# Altium PCB TE7300.PcbDoc
Units mil, origin at the board's own origin, x right, y up, seen from the top; angles counter-clockwise.
Board outline 1000 x 1000 mil, 2 copper layers (L 01, L 08), stack 57.418 mil thick; 7 components, 7 nets, 57 pads, 0 vias.
Unrouted connection lines stored in the file: 1.
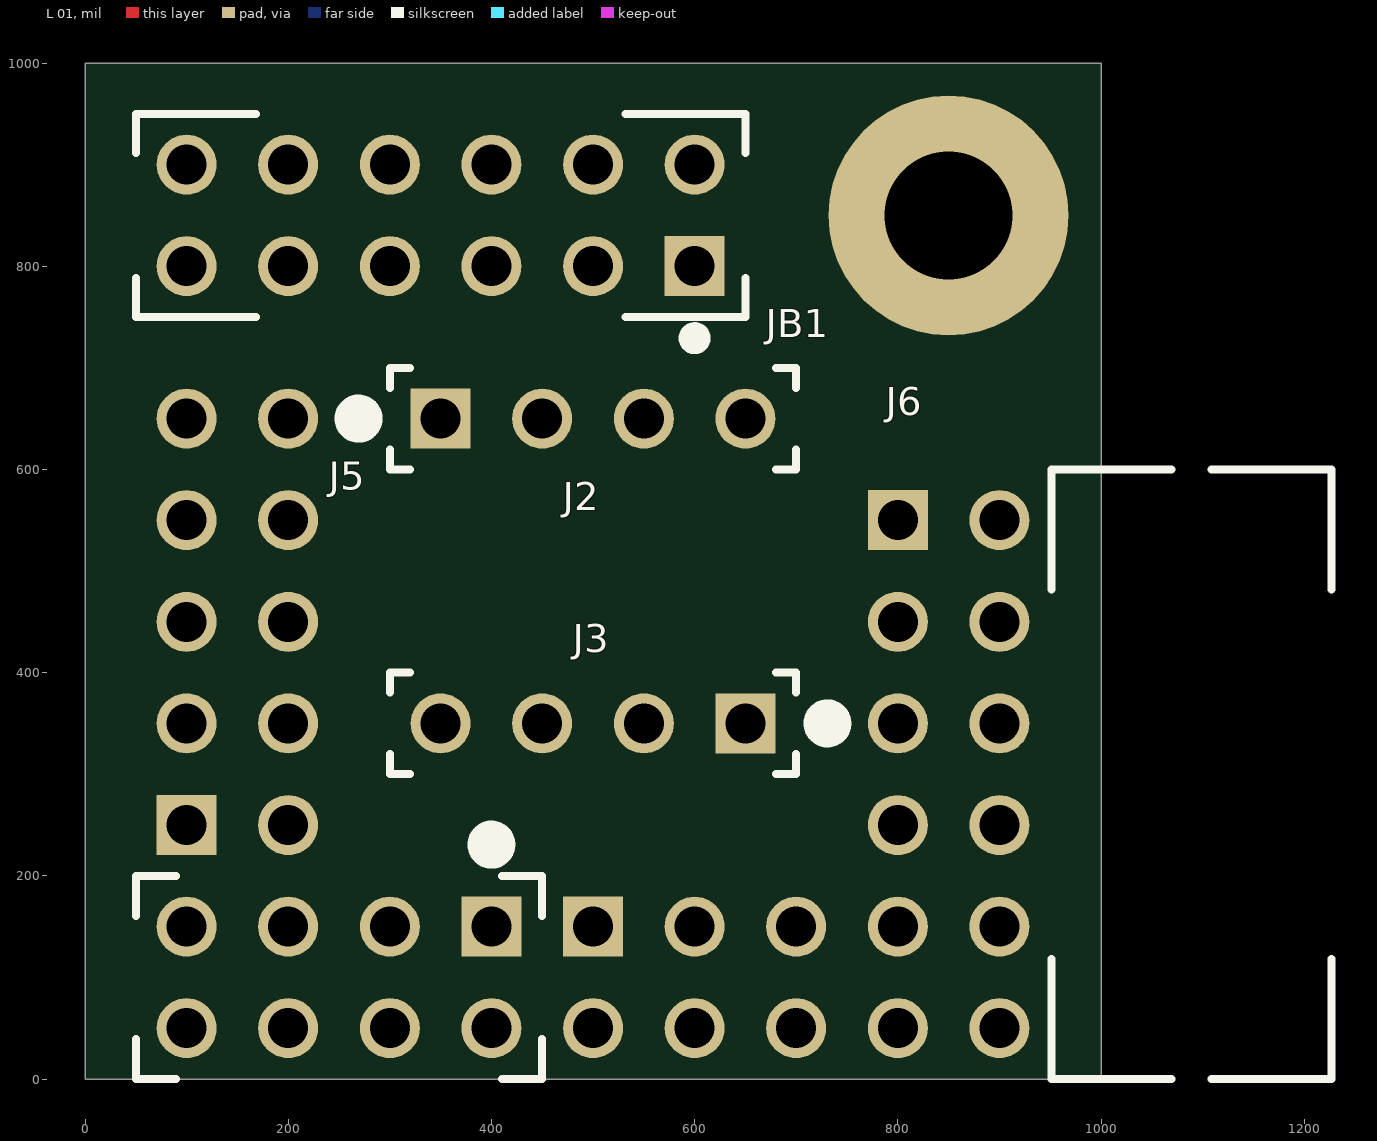
[diagram p0: L 01 view]
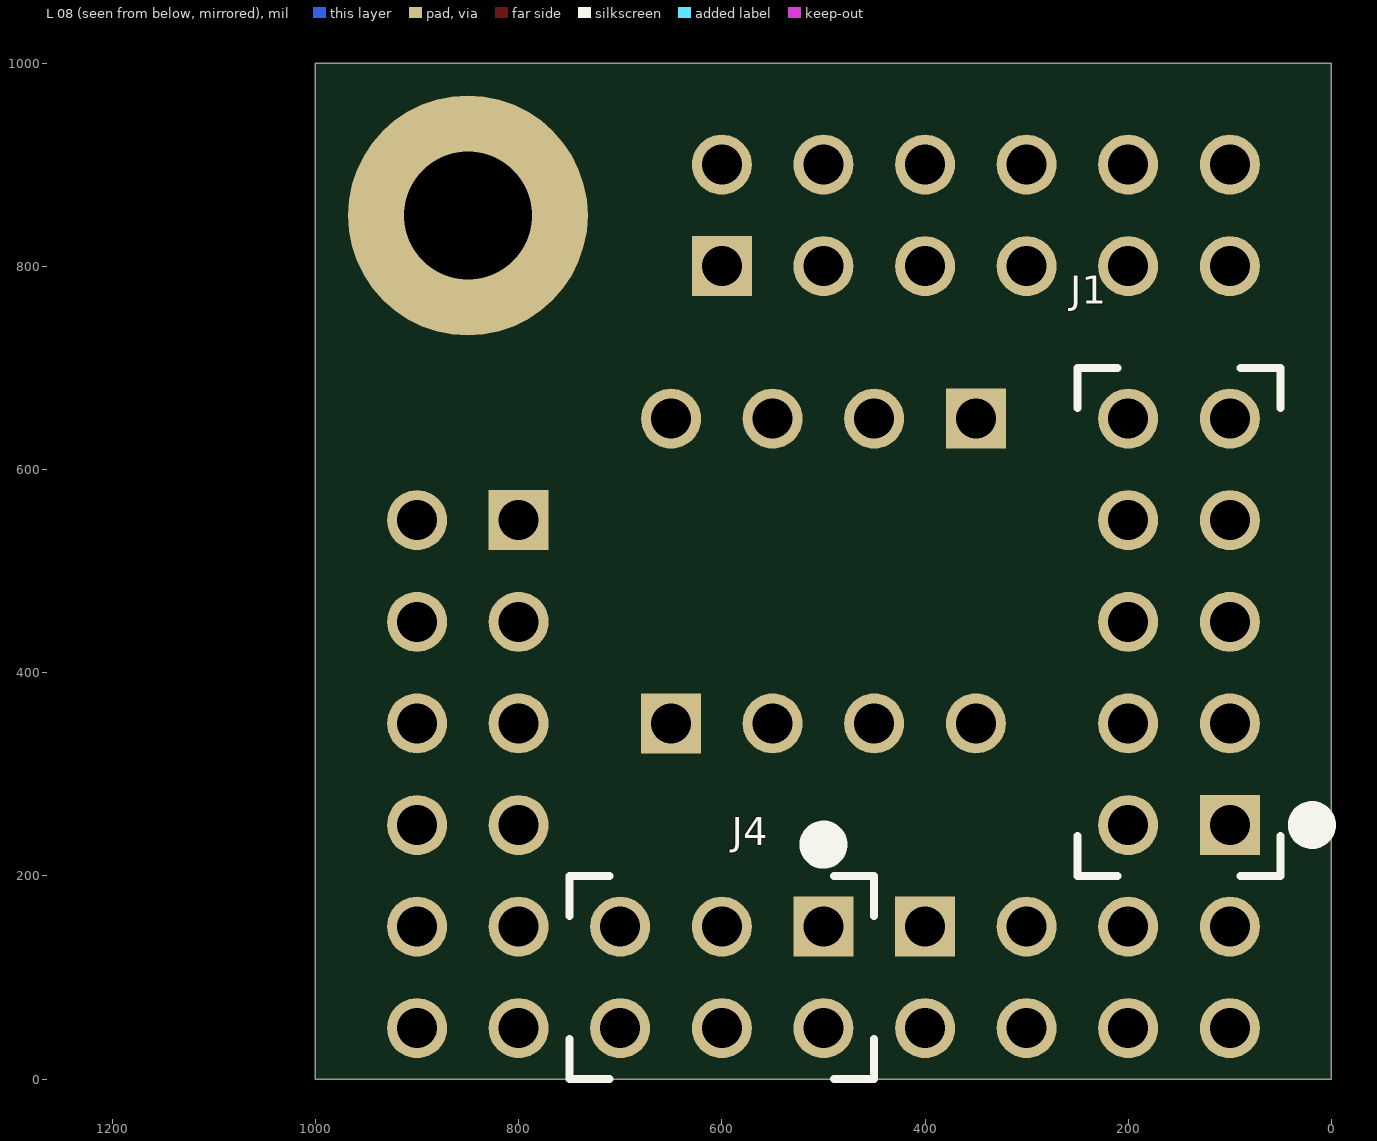
[diagram p1: L 08 view, seen from below]

## Layer stack, top to bottom
Top Solder: solder mask 1.378, Solder Resist, Dk 3.5
L 01: signal copper 0.709
Dielectric1: core 56, FR-4, Dk 4.2
L 08: signal copper 0.709
Bottom Solder: solder mask 1.378, Solder Resist, Dk 3.5

## Board outline
0,0 1000,0 1000,1000 0,1000

## Design rules (kind name [scope] priority, off if disabled: settings)
Clearance Clearance_topbotPoly [InPolygon vs (OnLayer('Multi-Layer') and IsPad) or OnLayer('L 01') or OnLayer('L 08')] p1: gap=7.87
Clearance [All] p2: gap=3.94 except(7.87: Poly-Poly Fill-Poly Arc-Poly Poly-Region THPad-Poly Track-Poly)
ComponentClearance "ComponentClearance_J2PM\"" [(InComponent('J2')) vs (InComponent('PM2'))] p1: gap=-157.48 collisioncheckmode=3 verticalgap=-39.37 showdistances=FALSE
ComponentClearance ComponentClearance_H3U7 [(InComponent('H3')) vs (InComponent('U7'))] p2: gap=-19.68 collisioncheckmode=3 verticalgap=-39.37 showdistances=FALSE
ComponentClearance ComponentClearance_-0.5mm [HasFootprint('FIDU-DOT - small') OR HasFootprint('NetTieTOP_D35mm')or HasFootprint('MHole3_2mm')] p3: gap=-19.68 collisioncheckmode=3 verticalgap=-0.5 showdistances=FALSE
ComponentClearance [All] p4: gap=-1.97 collisioncheckmode=3 verticalgap=19.68 showdistances=TRUE
DiffPairsRouting [All] p1: maxlimit=4.72 minlimit=4.72 mostfreqgap=4.72 toplayer_minwidth=2.95 toplayer_maxwidth=5.91 toplayer_prefwidth=3.94 bottomlayer_minwidth=2.95 bottomlayer_maxwidth=11.81 bottomlayer_prefwidth=3.94 maxuncoupledlength=1181.1
FabricationTestPointUsage TestPointUsage [All] p1: valid=0 allowmultiple=FALSE
FabricationTestpoint Testpoint [(IsPad And (OnTopLayer Or OnBottomLayer))] p1: side=3 testpointundercomponent=TRUE minsize=40 maxsize=100 preferedsize=60 minholesize=0 maxholesize=40 preferedholesize=32.01 testpointgrid=0.98 allowsidetop=TRUE allowsidebottom=TRUE usegrid=TRUE gridtolerance=0.01
FanoutControl Fanout_Small [All] p1 off: bgadir=Out bgaviamode=Centered fanoutstyle=Auto fanoutdirection=Alternating viagrid=1 // Protel DXP Scope 1 Expression Was: (CompPinCount < 5)   Fanout_Small (Default Rule)
FanoutControl Fanout_Default [All] p2: bgadir=Out bgaviamode=Centered fanoutstyle=Auto fanoutdirection=Alternating viagrid=1 // Fanout_Default (Default Rule)
FanoutControl Fanout_SOIC [All] p3 off: bgadir=Out bgaviamode=Centered fanoutstyle=Auto fanoutdirection=Alternating viagrid=1 // Protel DXP Scope 1 Expression Was: IsSOIC   Fanout_SOIC (Default Rule)
FanoutControl Fanout_BGA [All] p4 off: bgadir=Out bgaviamode=Centered fanoutstyle=Auto fanoutdirection=Alternating viagrid=1 // Protel DXP Scope 1 Expression Was: IsBGA   Fanout_BGA (Default Rule)
FanoutControl Fanout_LCC [All] p5 off: bgadir=Out bgaviamode=Centered fanoutstyle=Auto fanoutdirection=Alternating viagrid=1 // Protel DXP Scope 1 Expression Was: IsLCC   Fanout_LCC (Default Rule)
HoleSize [All] p1: absolutevalues=TRUE maxlimit=157.48 minlimit=7.87 maxpercent=80.000 minpercent=20.000
Length Lendht22mm [(InDifferentialPairClass('Lendht22mm'))] p1: maxlimit=874.02 minlimit=858.27
MatchedLengths "MatchedLengthsInDifPair< 0.5mm" [(InNetClass('D100-15') OR InNetClass('D100-25'))] p1: tolerance=19.68 checknetsindiffpair=TRUE checkdiffpairvsdiffpair=FALSE checkothers=FALSE
MatchedLengths "MatchedLengthsInDifPair< 1.5mm" [InAnyDifferentialPair] p2: tolerance=59.06 checknetsindiffpair=TRUE checkdiffpairvsdiffpair=FALSE checkothers=FALSE
MatchedLengths MatchedLengthsMCB_150Mil [InNetClass('MatchLendht150Mil') AND ((InNetClass('MCB1') OR InNetClass('MCB3')))] p3 off: tolerance=100 checknetsindiffpair=TRUE checkdiffpairvsdiffpair=TRUE checkothers=TRUE
MatchedLengths MatchedLengths300mil [InNetClass('MatchLendht300Mil')] p4 off: tolerance=100 checknetsindiffpair=FALSE checkdiffpairvsdiffpair=TRUE checkothers=TRUE
MinimumAnnularRing MinimumAnnularRing_MicroVia [(IsVia) And ViaSize <=  AsMM(0.1)] p1: minimumring=4.88
MinimumAnnularRing [All] p2: minimumring=4.72
PermittedLayers PermittedLayers-CAP3225 [(HasFootprint('CAPC3216N'))] p1: toplayerpermitted=TRUE bottomlayerpermitted=FALSE
PlaneClearance [All] p1: clearance=9.84
PlaneConnect PlaneConnect_Via [IsVia] p1: planeconnectstyle=Direct reliefexpansion=20 reliefentries=4 reliefconductorwidth=10 reliefairgap=10
PlaneConnect [All] p2: planeconnectstyle=Relief reliefexpansion=19.68 reliefentries=4 reliefconductorwidth=7.87 reliefairgap=9.84
PolygonConnect PolygonConnect_TopRilief [InPolygonClass('TopConnect')] p1: connectstyle=Relief reliefconductorwidth=10 reliefentries=4 polygonreliefangle="90 Angle" airgapwidth=7.87
PolygonConnect PolygonConnect_Direct [(HasFootprint('MHole2_7mm')) or IsVia or InComponent('H1') or InComponent('H2') or InComponent('H3') or InComponent('H4')] p2: connectstyle=Direct reliefconductorwidth=10 reliefentries=4 polygonreliefangle="90 Angle" airgapwidth=10 // Protel DXP Scope 1 Expression Was: IsVia
PolygonConnect [All] p3: connectstyle=Relief reliefconductorwidth=7.87 reliefentries=4 polygonreliefangle="90 Angle" airgapwidth=7.87
RoutingLayers "RoutingLayers_impedance control" [(InDifferentialPairClass('All Differential Pairs') OR InNetClass('D100-15') OR InNetClass('D100-25') OR InNetClass('D100-33') OR InNetClass('S50') OR InNetClass('S50-25') OR InNetClass('S50-33') OR InNetClass('S60-15'))] p1: top layer_v5=TRUE bottom layer_v5=TRUE
RoutingLayers [All] p2: top layer_v5=TRUE bottom layer_v5=TRUE
RoutingVias [All] p1: holewidth=9.84 width=19.68 viastyle="Through Hole" minholewidth=5.91 minwidth=11.81 maxholewidth=39.37 maxwidth=59.06
SMDNeckDown SMDNeckDown_80% [All] p1: percent=95.000
SMDToPlane [All] p1: distance=39370
SilkToSilkClearance [All] p1 off: silktosilkclearance=0.39
SilkToSolderMaskClearance SilkscreenOverComponentPads [IsPad] p1: minsilkscreentomaskgap=0.39 clearancetoexposedcopper=TRUE
SolderMaskExpansion SolderMaskExpansion_Via [IsVia] p1: expansion=-4.92
SolderMaskExpansion [All] p2: expansion=0
UnpouredPolygon [All] p1: allowunpoured=FALSE
Width Width_All_Differential_Pairs [(InDifferentialPairClass('All Differential Pairs'))] p1: maxlimit=4.72 minlimit=3.74 preferedwidth=3.94 minimp=50.000000 maximp=50.000000 favimp=50.000000
Width Logo [(InComponent('LOGO*'))] p2: maxlimit=10 minlimit=0.04 preferedwidth=10 // Protel DXP Scope 1 Expression Was: (InComponent('LOGO?'))
Width All [All] p3: maxlimit=118.11 minlimit=2.95 preferedwidth=3.94 minimp=50.000000 maximp=50.000000 favimp=50.000000
14 further rules are at their usual default settings.

## Classes and differential pairs
differential pair class Lendht22mm: MCB1_DRAM_CK MCB1_DRAM_DQS MCB1_DRAM_UDQ MCB3_DRAM_CK MCB3_DRAM_DQS MCB3_DRAM_UDQ

## Components (designator, comment, footprint, x,y, rotation, side; value= is the part's Value field where it differs from the comment)
J1 "Pin Header 2.54 2Row 10Pins" "STIFTLEISTE2_54 OG 2R-10" 150,450 r90 bottom
J2 "Pin Header 2.54 1Row 4Pins" "STIFTLEISTE2_54 OG 1R-4" 500,650 r180 top
J3 "Pin Header 2.54 1Row 4Pins" "STIFTLEISTE2_54 OG 1R-4" 500,350 r0 top
J4 "Pin Header 2.54 2Row 6Pins" "STIFTLEISTE2_54 OG 2R-6" 600,100 r0 bottom
J5 "Pin Header 2.54 2Row 8Pins" "STIFTLEISTE2_54 OG 2R-8" 250,100 r180 top
J6 "PMod 2x6 Socket 90°" PMod2x6 850,300 r270 top
JB1 "TE0790-Base" TE0790-Base 350,850 r270 top

## Footprints (in the part's own frame and the unit in brackets; to place one, negate y for a bottom-side part, rotate by r counter-clockwise, add the part's x,y. Pads: shape width x height; smd on the part's side, far side on the other; paste and mask are expansions set on the pad)
PMod2x6 [mm]
  rect 1.5x1.5 hole 1: 1(-6.35,-1.27)
  round 1.5 hole 1: 2(-3.81,-1.27) 3(-1.27,-1.27) 4(1.27,-1.27) 5(3.81,-1.27) 6(6.35,-1.27) 7(-6.35,1.27) 8(-3.81,1.27) 9(-1.27,1.27) 10(1.27,1.27) 11(3.81,1.27) 12(6.35,1.27)
  silkscreen extent -7.62,2.57 7.62,9.57, body extent -7.87,-1.58 7.87,11.31, height 4.98
"STIFTLEISTE2_54 OG 1R-4" [mm]
  rect 1.5x1.5 hole 1: 1(3.81,0)
  round 1.5 hole 1: 2(1.27,0) 3(-1.27,0) 4(-3.81,0)
  silkscreen extent -5.08,-1.27 6.16,1.27, body extent -5.08,-1.27 5.08,1.23, height 8.2
"STIFTLEISTE2_54 OG 2R-6" [mm]
  rect 1.5x1.5 hole 1: 1(-2.54,-1.27)
  round 1.5 hole 1: 2(-2.54,1.27) 3(0,-1.27) 4(0,1.27) 5(2.54,-1.27) 6(2.54,1.27)
  silkscreen extent -3.81,-3.62 3.81,2.54, body extent -3.81,-2.54 3.81,2.54, height 8.5
"STIFTLEISTE2_54 OG 2R-8" [mm]
  rect 1.5x1.5 hole 1: 1(-3.81,-1.27)
  round 1.5 hole 1: 2(-3.81,1.27) 3(-1.27,-1.27) 4(-1.27,1.27) 5(1.27,-1.27) 6(1.27,1.27) 7(3.81,-1.27) 8(3.81,1.27)
  silkscreen extent -5.08,-3.62 5.08,2.54, body extent -5.08,-2.54 5.08,2.54, height 8.5
"STIFTLEISTE2_54 OG 2R-10" [mm]
  rect 1.5x1.5 hole 1: 1(-5.08,-1.27)
  round 1.5 hole 1: 2(-5.08,1.27) 3(-2.54,-1.27) 4(-2.54,1.27) 5(0,-1.27) 6(0,1.27) 7(2.54,-1.27) 8(2.54,1.27) 9(5.08,-1.27) 10(5.08,1.27)
  silkscreen extent -6.35,-3.62 6.35,2.54, body extent -6.35,-2.54 6.35,2.54, height 8.5
TE0790-Base [mm]
  rect 1.5x1.5 hole 1: 1(1.27,6.35)
  round 1.5 hole 1: 2(-1.27,6.35) 3(1.27,3.81) 4(-1.27,3.81) 5(1.27,1.27) 6(-1.27,1.27) 7(1.27,-1.27) 8(-1.27,-1.27) 9(1.27,-3.81) 10(-1.27,-3.81) 11(1.27,-6.35) 12(-1.27,-6.35)
  round 6 hole 3.2: H1(0,12.7)
  silkscreen extent -2.54,-7.62 3.27,7.62, body extent -4.78,-7.75 15.24,18.7, height 14.23

## Part data
J1: library part 22402, "Stiftleiste gerade 2-reihig, 10pol."
J2 J3: library part 23162, "Stiftleiste gerade 1-reihig, 4pol."
J4: library part 22334, "Stiftleiste gerade 2-reihig, 6pol."
J5: library part 23904, "Stiftleiste gerade 2-reihig, 8pol."
J6: library part 25215
JB1: library part 26694

## Nets (pads, with @x,y where several pads share a name; then routed paths per layer and width w, separated by ;. In a path a pad name is that pad's centre, name@x,y a point inside that pad or via, vN(x,y) a via of type N, cw(c..) or ccw(c..) an arc to the next point about the centre after c; other vN are vias at no path point)
3.3V: J5.4 J5.8
ESP_GPIO0: J5.3
ESP_GPIO2: J5.5
ESP_RXD: J5.7
ESP_TXD: J5.2
GND: J5.1
MOD_RST: J5.6
pads on no net: J1.1 J1.2 J1.3 J1.4 J1.5 J1.6 J1.7 J1.8 J1.9 J1.10 J2.1 J2.2 J2.3 J2.4 J3.1 J3.2 J3.3 J3.4 J4.1 J4.2 J4.3 J4.4 J4.5 J4.6 J6.1 J6.2 J6.3 J6.4 J6.5 J6.6 J6.7 J6.8 J6.9 J6.10 J6.11 J6.12 JB1.1 JB1.2 JB1.3 JB1.4 JB1.5 JB1.6 JB1.7 JB1.8 JB1.9 JB1.10 JB1.11 JB1.12 JB1.H1

## Silkscreen, mask and mechanical layers (free items; w line width, h text height)
PCB-Outline-GM6:
  the board outline again, w3.94

## Dimensions
0,1000 to 0,0 on Dim-Top-GM1
0,0 to 1000,0 on Dim-Top-GM1

## Text inside footprints (layer, text, board x,y; h text height)
J1: Assembly Bot-GM14 "10" at 205.12,676.38 h39.37 r270; Assembly Bot-GM14 "9" at 55.51,668.5 h39.37 r270; Assembly Bot-GM14 "2" at 205.12,205.91 h39.37 r270; Assembly Bot-GM14 "1" at 59.45,210.83 h39.37 r270
J2: Assembly Top-GM13 "1" at 285.83,679.53 h60 r180; Assembly Top-GM13 "4" at 751.57,679.53 h60 r180
J3: Assembly Top-GM13 "1" at 714.17,320.47 h60; Assembly Top-GM13 "4" at 248.43,320.47 h60
J4: Assembly Bot-GM14 "5" at 718.11,194.49 h39.37 r180; Assembly Bot-GM14 "6" at 718.11,43.9 h39.37 r180; Assembly Bot-GM14 "2" at 455.32,44.88 h39.37 r180; Assembly Bot-GM14 "1" at 460.83,188.98 h39.37 r180
J5: Assembly Top-GM13 "2" at 444.88,44.88 h39.37 r180; Assembly Top-GM13 "8" at 81.69,44.88 h39.37 r180; Assembly Top-GM13 "7" at 81.69,194.49 h39.37 r180; Assembly Top-GM13 "1" at 439.17,190.55 h39.37 r180
J6: Assembly Top-GM13 "1" at 779.13,614.96 h39.37 r270; Assembly Top-GM13 "7" at 881.5,614.96 h39.37 r270; Assembly Top-GM13 "12" at 881.5,12.6 h39.37 r270; Assembly Top-GM13 "6" at 779.13,12.6 h39.37 r270
JB1: Assembly Top-GM13 "11" at 144.1,810.63 h39.37 r180; Assembly Top-GM13 "12" at 144.1,928.74 h39.37 r180; Assembly Top-GM13 "2" at 614.96,928.74 h39.37 r180; Assembly Top-GM13 "1" at 614.96,810.63 h39.37 r180